# Altium PCB PADS_PCB.PcbDoc
Units mm, origin at the board's own origin, x right, y up, seen from the top; angles counter-clockwise.
Board outline 50 x 26 mm, 2 copper layers (Top Layer, Bottom Layer); 47 components, 29 nets, 195 pads, 13 vias.
Unrouted connection lines stored in the file: 111.
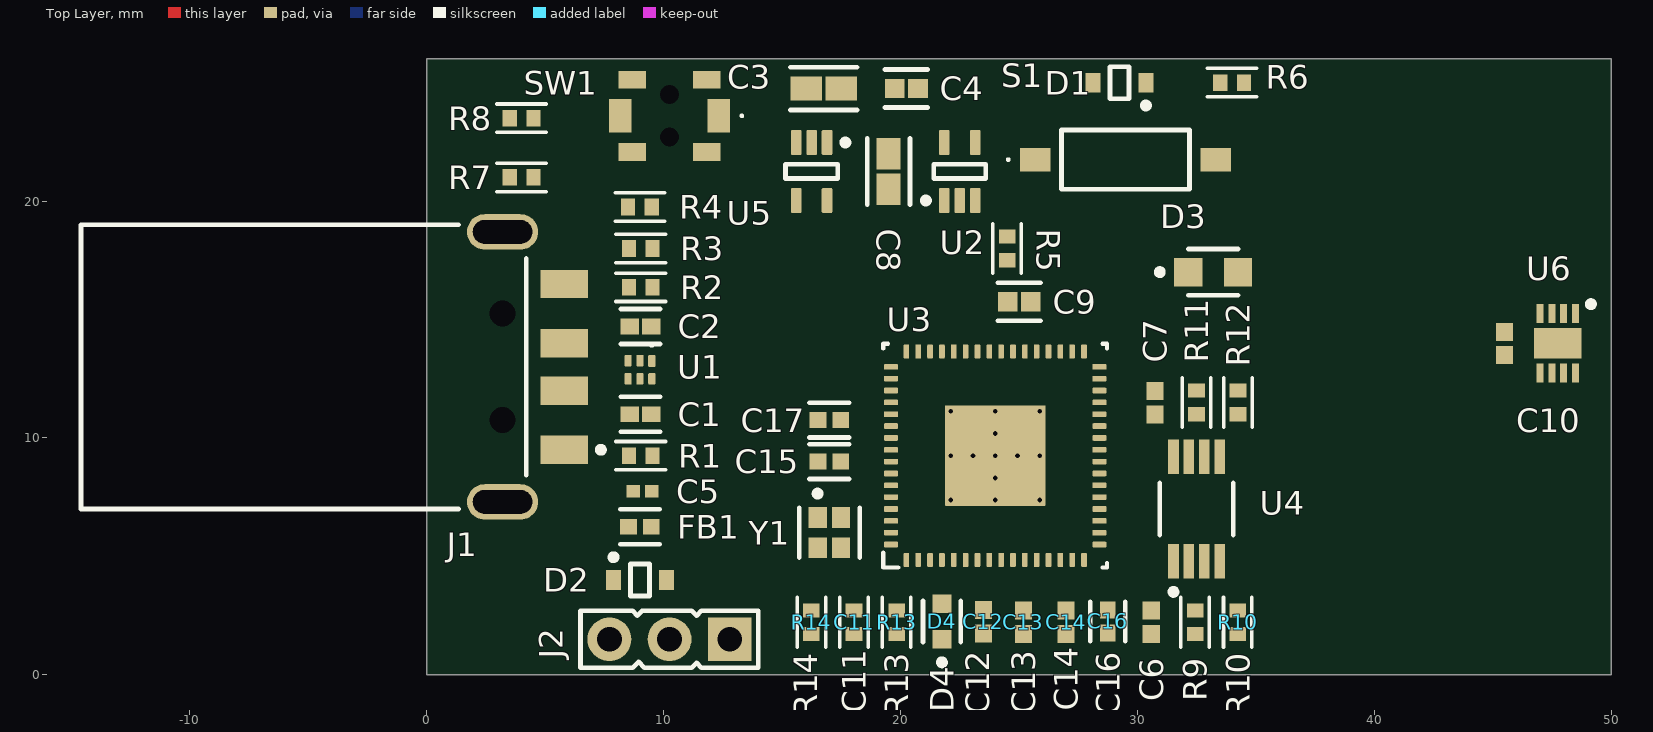
[diagram p0: Top Layer view]
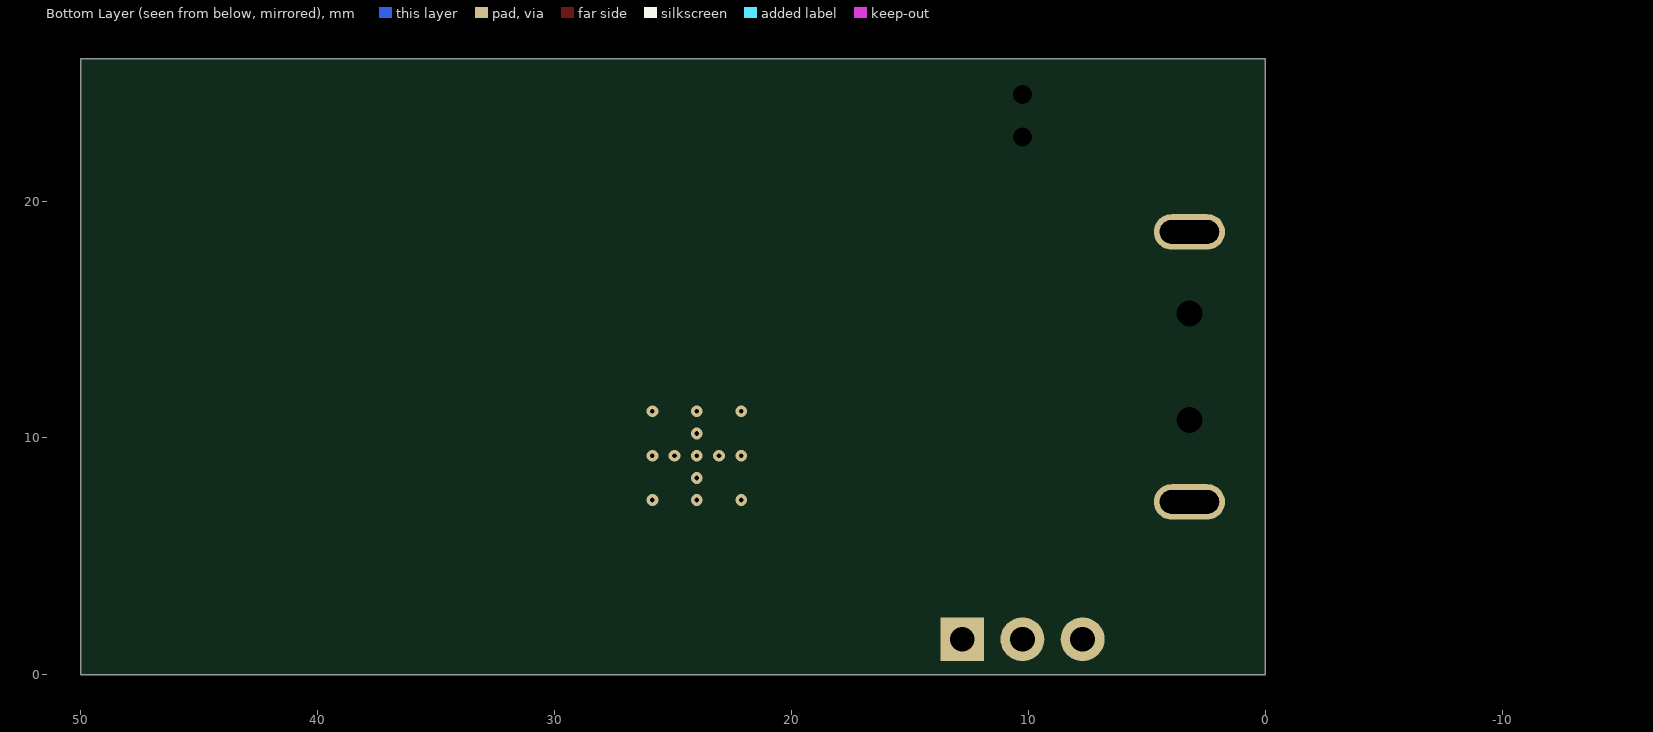
[diagram p1: Bottom Layer view, seen from below]

## Layer stack, top to bottom
Top Solder: solder mask 0.0102, Solder Resist, Dk 3.5
Top Layer: signal copper 0.0356
Dielectric 1: dielectric 0.32, FR-4, Dk 4.8
Bottom Layer: signal copper 0.0356
Bottom Solder: solder mask 0.0102, Solder Resist, Dk 3.5

## Board outline
0,0 50,0 50,26 0,26

## Design rules (kind name [scope] priority, off if disabled: settings)
Clearance [All] p1: gap=0.203 ignorepadtopadclearanceinfootprint=TRUE
PolygonConnect [All] p1: connectstyle=Relief reliefconductorwidth=0.254 reliefentries=4 polygonreliefangle="90 Angle" airgapwidth=0.254
RoutingVias [All] p1: holewidth=0.711 width=1.27 viastyle="Through Hole" minholewidth=0.711 minwidth=1.27 maxholewidth=0.711 maxwidth=1.27
SolderMaskExpansion [All] p1: expansion=0.102 istentingtop=FALSE
SupplyNets "Schematic Supply Nets_5" [InNet('3V3')] p1: voltage=0.000
SupplyNets "Schematic Supply Nets_4" [InNet('GND')] p2: voltage=0.000
SupplyNets "Schematic Supply Nets_3" [InNet('VCORE')] p3: voltage=0.000
SupplyNets "Schematic Supply Nets_2" [InNet('V18')] p4: voltage=0.000
SupplyNets "Schematic Supply Nets_1" [InNet('VCC')] p5: voltage=0.000
SupplyNets "Schematic Supply Nets" [InNet('VUSB')] p6: voltage=0.000
Width [All] p1: maxlimit=0.254 minlimit=0.254 preferedwidth=0.254
30 further rules are at their usual default settings.

## Components (designator, comment, footprint, x,y, rotation, side; value= is the part's Value field where it differs from the comment)
C1 "10pF" FP-C0402-BB-IPC_A 9.021,11 r0 top value="10 pF"
C2 "10pF" FP-C0402-BB-IPC_A 9.021,14.703 r0 top value="10 pF"
C3 "10uF" FP-C1608-080-0_1-IPC_A 16.759,24.75 r180 top
C4 "2.2uF" FP-GRM155-0_2-IPC_A 20.25,24.75 r180 top
C5 "100nF" CAPC1005X55X25LL05T10 9.11,7.75 r180 top
C6 "100nF" CAPC1005X55X25ML05T10 30.589,2.217 r90 top
C7 "100nF" CAPC1005X55X25ML05T10 30.75,11.49 r270 top
C8 "10uF" FP-C1608-080-0_1-IPC_A 19.5,21.25 r270 top
C9 "2.2uF" FP-GRM155-0_2-IPC_A 25.011,15.75 r0 top
C10 "100nF" CAPC1005X55X25ML05T10 45.5,13.99 r270 top
C11 "2.2nF" RES 18.039,2.217 r270 top
C12 "100nF" CAPC1005X55X25ML05T10 23.5,2.24 r90 top
C13 "100nF" CAPC1005X55X25ML05T10 25.189,2.217 r90 top
C14 "100nF" CAPC1005X55X25ML05T10 26.989,2.217 r90 top
C15 "470nF" FP-0402-L_1_0_0_05-W_0_5-IPC_A 17,9 r180 top
C16 "470nF" FP-0402-L_1_0_0_05-W_0_5-IPC_A 28.75,2.25 r270 top
C17 "470nF" FP-0402-L_1_0_0_05-W_0_5-IPC_A 17,10.75 r180 top
D1 "4V3" ONSC-SOD-323-2-477-02_V 29.25,25 r180 top
D2 "6V2" ONSC-SOD-323-2-477-02_V 9,4 r0 top
D3 "Green" FP-APHCM2012CGCK-F01-MFG 33.2,17 r0 top
D4 "Red" FP-SML-LX0603SIW-TR-MFG 21.75,2.25 r90 top
FB1 "220Ω" FP-BLM15-0_05-IPC_A 9,6.25 r180 top
J1 "480-37-1000" MOLX-480-37-1000_V 4.5,13 r270 top
J2 "Header_3x1" HEADER_3X1 12.79,1.5 r180 top
R1 "22" RES 9.033,9.25 r180 top
R2 "22" RES 9.033,16.361 r180 top
R3 "1M" RES 9.033,18 r180 top
R4 "1k5" RES 9,19.75 r180 top
R5 "100k" RES 24.5,18 r90 top
R6 "1k" RES 34,25 r180 top
R7 "47" RES 4,21 r180 top
R8 "110" RES 4,23.5 r180 top
R9 "10k" RES 32.439,2.217 r270 top
R10 "10k" RES 34.239,2.217 r270 top
R11 "10k" RES 32.5,11.5 r90 top
R12 "10k" RES 34.25,11.5 r90 top
R13 "1k" RES 19.839,2.217 r270 top
R14 "33k" RES 16.239,2.217 r90 top
S1 "CHS-01TB" CHS01TB 29.5,21.75 r270 top
SW1 "PTS820 J20M SMTR LFS" PTS820J20MPSMTRLFS 10.25,23.6 r180 top
U1 "TPD4E004DRYR" DRY0006A 9,12.88 r270 top
U2 "TLV70033DCKR" DCK0005A_M 22.5,21.25 r90 top
U3 "MSP430F5528IRGCR" RGC0064B 24,9.25 r90 top
U4 "TCA9517DGKR" FP-DGK0008A-MFG 32.5,7 r90 top
U5 "TLV70033DCKR" DCK0005A_M 16.25,21.25 r270 top
U6 "HDC3020DEF" SON50P250X250X80-9N-D 47.75,14 r270 top
Y1 "24MHz" FP-ABM11W-MFG 17,6 r270 top

## Footprints (in the part's own frame and the unit in brackets; to place one, negate y for a bottom-side part, rotate by r counter-clockwise, add the part's x,y. Pads: shape width x height; smd on the part's side, far side on the other; paste and mask are expansions set on the pad)
CAPC1005X55X25LL05T10 [mm] "Chip Capacitor, 2-Leads, Body 1.05x0.55mm, IPC High Density"
  rect 0.56x0.52 smd: 1(-0.39,0) 2(0.39,0)
  body extent -0.53,-0.28 0.53,0.28, height 0.55
CAPC1005X55X25ML05T10 [mm] "Chip Capacitor, 2-Leads, Body 1.05x0.55mm, IPC Low Density"
  rect 0.76x0.72 smd: 1(-0.49,0) 2(0.49,0)
  body extent -0.53,-0.28 0.53,0.28, height 0.55
CHS01TB [mm]
  rect 1x1.27 smd: 1(0,-3.81) 2(0,3.81)
  silkscreen extent -1.25,-5 1.25,2.7
DCK0005A_M [mm] "SOT23, 5-Leads, Body 2.15x1.4mm, Pitch 0.65mm, IPC Low Density"
  rrect22% 1.05x0.45 smd: 1(-1.225,0.65) 2(-1.225,0) 3(-1.225,-0.65) 4(1.225,-0.65) 5(1.225,0.65)
  silkscreen extent -1.35,-1.1 0.3,1.55, body extent -1.14,-1 1.14,1, height 0.94
DRY0006A [mm] "SON, 6-Leads, Body 1.45x1mm, Pitch 0.5mm"
  rrect33% 0.52x0.3 smd: 1(-0.37,0.5)
  rrect33% 0.49x0.3 smd: 2(-0.385,0) 3(-0.385,-0.5) 4(0.385,-0.5) 5(0.385,0) 6(0.385,0.5)
  silkscreen extent -1.08,0.45 -0.98,0.55, body extent -0.5,-0.72 0.5,0.72, height 0.6
FP-0402-L_1_0_0_05-W_0_5-IPC_A [mm]
  rect 0.715x0.672 smd paste+0 mask+0: 1(-0.479,0) 2(0.479,0)
  silkscreen extent -0.84,-0.74 0.84,0.74, body extent -1.04,-0.54 1.04,0.54, height 0.25
FP-ABM11W-MFG [mm]
  rect 0.875x0.775 smd paste+0 mask+0: 1(-0.637,-0.487) 2(0.637,-0.487) 3(0.637,0.487) 4(-0.637,0.487)
  silkscreen extent -1.77,-1.28 1.05,1.28, body extent -1.17,-0.97 1.17,0.97, height 0.25
FP-APHCM2012CGCK-F01-MFG [mm]
  rect 1.2x1.2 smd paste+0 mask+0: 1(-1.05,0) 2(1.05,0)
  silkscreen extent -2.37,-0.97 1.05,0.97, body extent -1.75,-0.77 1.75,0.77, height 0.25
FP-BLM15-0_05-IPC_A [mm]
  rect 0.715x0.672 smd paste+0 mask+0: 1(-0.479,0) 2(0.479,0)
  silkscreen extent -0.84,-0.74 0.84,0.74, body extent -1.04,-0.54 1.04,0.54, height 0.25
FP-C0402-BB-IPC_A [mm]
  rect 0.765x0.672 smd paste+0 mask+0: 1(-0.454,0) 2(0.454,0)
  silkscreen extent -0.84,-0.74 0.84,0.74, body extent -1.04,-0.54 1.04,0.54, height 0.25
FP-C1608-080-0_1-IPC_A [mm]
  rect 1.331x1.012 smd paste+0 mask+0: 1(-0.741,0) 2(0.741,0)
  silkscreen extent -1.41,-0.91 1.41,0.91, body extent -1.91,-1.01 1.91,1.01, height 0.25
FP-DGK0008A-MFG [mm]
  rect 1.45x0.45 smd paste+0 mask+0: 1(-2.2,0.975) 2(-2.2,0.325) 3(-2.2,-0.325) 4(-2.2,-0.975) 5(2.2,-0.975) 6(2.2,-0.325) 7(2.2,0.325) 8(2.2,0.975)
  silkscreen extent -3.62,-1.55 1.1,1.55, body extent -3.03,-1.8 3.03,1.8, height 0.25
FP-GRM155-0_2-IPC_A [mm]
  rect 0.828x0.806 smd paste+0 mask+0: 1(-0.489,0) 2(0.489,0)
  silkscreen extent -0.9,-0.8 0.9,0.8, body extent -1.1,-0.6 1.1,0.6, height 0.25
FP-SML-LX0603SIW-TR-MFG [mm]
  rect 0.8x0.8 smd paste+0 mask+0: 1(-0.75,0) 2(0.75,0)
  silkscreen extent -1.85,-0.8 0.86,0.8, body extent -1.25,-0.56 1.25,0.56, height 0.25
HEADER_3X1 [mm]
  rect 1.85x1.85 hole 1.05: 1(0,0)
  round 1.85 hole 1.05: 2(2.54,0) 3(5.08,0)
  silkscreen extent -1.2,-1.2 6.3,1.2
MOLX-480-37-1000_V [mm] "CONN, 4-Leads, Body 12x18.8mm"
  rect 1.2x2 smd: 1(3.5,1.3) 2(1,1.3) 3(-1,1.3) 4(-3.5,1.3)
  oval 1.5x3 hole 1 slot 2.5 at 90 deg: 5(-5.7,-1.3) 6(5.7,-1.3)
  round 0.5 hole 1.1 unplated: MH1(-2.25,-1.3) MH2(2.25,-1.3)
  silkscreen extent -6,-19.1 6,2.98, body extent -6.35,-19.08 6.35,2.2, height 3.07
ONSC-SOD-323-2-477-02_V [mm] "SOD, 2-Leads, Body 1.7x1.25mm"
  rect 0.63x0.83 smd: 1(-1.115,0) 2(1.115,0)
  silkscreen extent -1.24,-0.67 0.4,1.09, body extent -0.85,-0.63 0.85,0.63, height 1.06
PTS820J20MPSMTRLFS [mm]
  rect 0.95x1.4 smd: 1(-2.075,0) 2(2.075,0)
  rect 1.15x0.75 smd: 3(-1.575,-1.525) 4(1.575,-1.525) 5(1.575,1.525) 6(-1.575,1.525)
  round 0.4 hole 0.8 unplated: 7(0,-0.9) 8(0,0.9)
  silkscreen extent -3.1,-0.05 -3,0.05, body extent -2.25,-1.45 2.25,1.45, height 2.05
RES [mm] "0402 Resistor Footprint"
  rect 0.6x0.7 smd: 1(-0.5,0) 2(0.5,0)
  silkscreen extent -1.05,-0.6 1.05,0.6
RGC0064B [mm] "QFN, 64-Leads, Body 9.15x9.15mm, Pitch 0.5mm"
  rrect42% 0.6x0.24 smd mask+0.07: 1(-4.4,3.75) 2(-4.4,3.25) 3(-4.4,2.75) 4(-4.4,2.25) 5(-4.4,1.75) 6(-4.4,1.25) 7(-4.4,0.75) 8(-4.4,0.25) 9(-4.4,-0.25) 10(-4.4,-0.75) 11(-4.4,-1.25) 12(-4.4,-1.75) 13(-4.4,-2.25) 14(-4.4,-2.75) 15(-4.4,-3.25) 16(-4.4,-3.75) 33(4.4,-3.75) 34(4.4,-3.25) 35(4.4,-2.75) 36(4.4,-2.25) 37(4.4,-1.75) 38(4.4,-1.25) 39(4.4,-0.75) 40(4.4,-0.25) 41(4.4,0.25) 42(4.4,0.75) 43(4.4,1.25) 44(4.4,1.75) 45(4.4,2.25) 46(4.4,2.75) 47(4.4,3.25) 48(4.4,3.75)
  rrect42% 0.24x0.6 smd mask+0.07: 17(-3.751,-4.4) 18(-3.251,-4.4) 19(-2.751,-4.4) 20(-2.251,-4.4) 21(-1.75,-4.4) 22(-1.25,-4.4) 23(-0.75,-4.4) 24(-0.25,-4.4) 25(0.25,-4.4) 26(0.75,-4.4) 27(1.25,-4.4) 28(1.75,-4.4) 29(2.251,-4.4) 30(2.751,-4.4) 31(3.251,-4.4) 32(3.751,-4.4) 49(3.751,4.4) 50(3.251,4.4) 51(2.751,4.4) 52(2.251,4.4) 53(1.75,4.4) 54(1.25,4.4) 55(0.75,4.4) 56(0.25,4.4) 57(-0.25,4.4) 58(-0.75,4.4) 59(-1.25,4.4) 60(-1.75,4.4) 61(-2.251,4.4) 62(-2.751,4.4) 63(-3.251,4.4) 64(-3.751,4.4)
  rrect2% 4.25x4.25 smd paste-2.112: 65(0,0)
  silkscreen extent -4.72,-4.72 4.72,4.72, body extent -4.57,-4.57 4.57,4.57, height 1.01
SON50P250X250X80-9N-D [mm]
  rect 0.8x0.3 smd: 1(-1.25,0.75) 2(-1.25,0.25) 3(-1.25,-0.25) 4(-1.25,-0.75) 5(1.25,-0.75) 6(1.25,-0.25) 7(1.25,0.25) 8(1.25,0.75)
  rect 1.3x2 smd: 9(0,0)
  silkscreen extent -1.77,1.28 -1.53,1.53, body extent -1.3,-1.25 1.3,1.25, height 0.8

## Part data
C1 C2: library part CMP-2008-03443-2, "C0402C100K4GACTU / CAP CER 10PF 16V 10% NP0 0402", Capacitance="10 pF", Manufacturer=Kemet, Manufacturer Part Number=C0402C100K4GACTU, Package=C0402-BB, Temperature="-55°C to +125°C", Temperature Characteristic=C0G, Temperature Coefficient=15%, Temperature Range High=+125°C, Temperature Range Low=-55°C, Tolerance=0.1, Voltage Rating="16 V", Automotive=No, Category=Cap, ComponentLink2Description=Datasheet, ComponentLink2URL=https://content.kemet.com/datasheets/KEM_C1002_X7R_SMD.pdf, Device Class L1="Passive Components", Device Class L2=Capacitors, Device Class L3="Ceramic Capacitors", Digikey Description="CAP CER 10PF 16V 10% NP0 0402", Height=0.55mm, Ipc Land Pattern Name=CAPC10050X50, Lead Free=Yes, Material=Ceramic, Mouser Description="Multilayer Ceramic Capacitors MLCC - SMD/SMT 16volts 10pF C0G 10%", Octopart=https://octopart.com/c0402c100k4gactu-kemet-12569135, RoHS=TRUE
C3 C8: library part CMP-2000-04980-2, "C1608X5R1A106M080AC / Multilayer Ceramic Capacitors 10μF ±20% 10V X5R SMD 0603", Case Code (Imperial)=0603, Case Code (Metric)=1608, Dielectric=X5R, Dielectric Material=Ceramic, Max Operating Temperature=85°C, Min Operating Temperature=-55°C, Package Quantity=1, Tolerance=20%, Voltage Rating=10V, Capacitance=10uF, Case/Package=0603, Construction=Flat, Depth=0.8mm, Height=0.8mm, Lead Free="Lead Free", Length=1.6mm, Mount="Surface Mount", Number of Pins=2, Packaging="Tape and Reel", Radiation Hardening=No, REACH SVHC="No SVHC", Resistor Type=Ceramic, RoHS Compliant=Yes, Series=C, Termination=SMD/SMT, Thickness=0.035inch, Voltage Rating (DC)=10V, Weight=7.1E-05oz, Width=0.031inch
C4 C9: library part CMP-06035-001793-1, "GRM155R61C225KE11D / Chip Multilayer Ceramic Capacitors for General Purpose, 0402, 2.2uF, X5R, 15%, 10%, 16V", Case Code (Imperial)=0402, Case Code (Metric)=1005, Max Operating Temperature=85°C, Min Operating Temperature=-55°C, Tolerance=10%, Voltage Rating=16V, Capacitance=2.2uF, Case/Package=0402, Height=0.3mm, Lead Free="Lead Free", Length=0.039inch, Material=Ceramic, Mount="Surface Mount", Packaging="Tape and Reel", Thickness=0.022inch, Voltage Rating (DC)=16V, Width=0.02inch
C5 C6 C7 C10 C12 C13 C14: library part CMP-2000-06554-2, "LMK105BJ104KV-F / CAP, CERM, 0.1 uF, 10 / V,+/- 10%, X5R, 0402", Case Code (Imperial)=0402, Case Code (Metric)=1005, Dielectric=X5R, Max Operating Temperature=85°C, Min Operating Temperature=-55°C, Package Quantity=1, Resistor Type=Ceramic, Tolerance=10%, Voltage Rating=10V, Capacitance=100nF, Case/Package=0402, Construction=Flat, Contact Plating=Tin, Depth=0.5mm, Halogen Free="Halogen Free", Height=0.5mm, Lead Free="Lead Free", Length=1mm, Mount="Surface Mount", Number of Pins=2, Packaging="Tape and Reel", Radiation Hardening=No, REACH SVHC="No SVHC", RoHS Compliant=Yes, Series=M, Termination=SMD/SMT, Thickness=0.022inch, Voltage Rating (DC)=10V, Width=0.02inch
C11: library part CAP, "CL05B222JB5NNNC / CAP, CERM, 2200 pF, 50 / V, +/- 5%, X7R, 0402", Supplier Part Number=CL05B222JB5NNNC, Supplier="Arrow Electronics"
C15 C16 C17: library part CMP-14477-000096-2, "JMK105B7474KVHF / CAP, CERM, 0.47 uF, 6.3 / V, +/- 10%, X7R, 0402", Case Code (Imperial)=0402, Case Code (Metric)=1005, Dielectric=X7R, Max Operating Temperature=125°C, Min Operating Temperature=-55°C, Package Quantity=10000, Ratings=AEC-Q200, Tolerance=10%, Voltage Rating=6.3V, Capacitance=470nF, Case/Package=0402, Halogen Free="Halogen Free", Height=0.5mm, Lead Free="Lead Free", Length=0.039inch, Mount="Surface Mount", Packaging="Tape and Reel", RoHS Compliant=Yes, Termination=SMD/SMT, Thickness=0.022inch, Voltage Rating (DC)=6.3V, Weight=2.3E-05oz, Width=0.5mm
D1: library part CMP-1060-00656-1, "SZMM3Z4V3T1G / Zener Voltage Regulator, 300 mW, 2-Pin SOD-323, Pb-Free, Tape and Reel", Manufacturer="On Semiconductor", PartNumber=SZMM3Z4V3T1G, ComponentLink1Description="Manufacturer URL", ComponentLink1URL=http://www.onsemi.com/, ComponentLink2Description=Datasheet, ComponentLink2URL=http://www.onsemi.cn/pub_link/Collateral/MM3Z2V4T1-D.PDF, ComponentLink3Description="Package Specification", ComponentLink3URL=http://www.onsemi.com/pub_link/Collateral/477-02.PDF.1, DatasheetVersion="Rev. 9", Mounting Technology="Surface Mount", P Max (W)=0.3, PackageDescription="2-Pin SOD, Body 1.7 x 1.25 mm", PackageReference=SOD-323-2-477-02, PackageVersion="Rev. H, 03/2007", Packing="Tape and Reel", RoHS=Pb-Free, VZ Typ (V)=4.3
D2: library part CMP-1060-00681-1, "SZMM3Z6V2ST1G / Zener Voltage Regulator, 300 mW, Tight Tolerance Portfolio, 2-Pin SOD-323, Pb-Free, Tape and Reel", Manufacturer="On Semiconductor", PartNumber=SZMM3Z6V2ST1G, ComponentLink1Description="Manufacturer URL", ComponentLink1URL=http://www.onsemi.com/, ComponentLink2Description=Datasheet, ComponentLink2URL=http://www.onsemi.cn/pub_link/Collateral/MM3Z2V4ST1-D.PDF, ComponentLink3Description="Package Specification", ComponentLink3URL=http://www.onsemi.com/pub_link/Collateral/477-02.PDF.1, DatasheetVersion="Rev. 21", Mounting Technology="Surface Mount", P Max (W)=0.3, PackageDescription="2-Pin SOD, Body 1.7 x 1.25 mm", PackageReference=SOD-323-2-477-02, PackageVersion="Rev. H, 03/2007", Packing="Tape and Reel", RoHS=Pb-Free
D3: library part CMP-44529-000062-1, "APHCM2012CGCK-F01 / LED GREEN CLEAR CHIP SMD", Case Code (Imperial)=0805, Case Code (Metric)=2012, Forward Current=20mA, Forward Voltage=2.1V, Lens Color=Clear, Max Operating Temperature=85°C, Min Operating Temperature=-40°C, Package Quantity=1, Case/Package=0805, Color=Green, Dominant Wavelength=570nm, Height=0.4mm, Illumination Color=Green, Lead Free="Lead Free", Length=2mm, Lens Style=Clear, Luminous Intensity=40mcd, Mount="Surface Mount", Number of LEDs=1, Number of Pins=2, Packaging="Tape and Reel", RoHS Compliant=Yes, Series=APHCM, Test Current=20mA, Viewing Angle=110°, Wavelength=570nm, Width=1.25mm
D4: library part CMP-57192-000009-1, "SML-LX0603SIW-TR / LED RED DIFFUSED SMD", Case Code (Imperial)=0603, Case Code (Metric)=1608, Forward Current=20mA, Forward Voltage=2V, Lens Color=White, Max Operating Temperature=85°C, Min Operating Temperature=-25°C, Package Quantity=1, Power Rating=50mW, Approvals=UL, Case/Package=0603, Color=Red, Dominant Wavelength=636nm, Height=0.6mm, Illumination Color=Red, Lead Free="Lead Free", Length=1.6mm, Lens Style=Diffused, Lens Transparency=Diffused, Luminous Intensity=60mcd, Moisture Sensitivity Level=2, Mount="Surface Mount", Number of LEDs=1, Number of Pins=2, Packaging="Tape and Reel", REACH SVHC="No SVHC", RoHS Compliant=Yes, Test Current=20mA, Viewing Angle=140°, Wavelength=636nm, Width=0.8mm
FB1: library part CMP-0686-00173-4, "Chip Ferrite Bead, 0402, 220Ω @ 100MHz, 0.29Ω, 25%, 450mA", Case Code (Imperial)=0402, Case Code (Metric)=1005, Current Rating=450mA, DC Current=300mA, DC Resistance (DCR)=290mR, Max Operating Temperature=125°C, Min Operating Temperature=-55°C, Package Quantity=1, Resistance=350mR, Test Frequency=100MHz, Tolerance=25%, Case/Package=0402, Core Material=Ferrite, Depth=0.55mm, Height=0.5mm, Impedance=220R, Lead Free="Lead Free", Length=1mm, Material=Steel, Max Current Rating=450mA, Max DC Current=300mA, Military Standard=Not, Number of Circuits=1, Number of Lines=1, Number of Pins=2, Packaging="Tape and Reel", Radiation Hardening=No, REACH SVHC="No SVHC", RoHS Compliant=Yes, Shielding=Unshielded, Termination=SMD/SMT, Width=0.5mm
J1: library part CMP-1676-00005-2, "Universal Serial Bus (USB) Shielded I/O Plug, Type A, Right Angle Connector, 1.5 A, -20 to 85 degC, 4-Pin SMD, RoHS, Tray", Case Code (Imperial)=0603, Case Code (Metric)=1608, Max Operating Temperature="155 degC", Min Operating Temperature="-55 degC", Package Quantity=5000, Power Rating="100 mW", Resistance="1 mohm", Tolerance=1%, Voltage Rating="50 V", Case\Package=0603, ComponentLink1Description="Manufacturer URL", ComponentLink1URL=http://www.molex.com/, ComponentLink2Description=Datasheet, ComponentLink2URL=http://www.molex.com/pdm_docs/sd/480371000_sd.pdf, DatasheetVersion="Rev. D, 06/2004", Height="0.45 mm", Length="1.6 mm", Mount="Surface Mount", PackageDescription="4-Pin Surface Mount Device, Body 12 x 18.8 mm", PackageReference=480-37-1000, Packaging="Tape and Reel", Pins=2, REACH SVHC="No SVHC", RoHSCompliant=true, Voltage Rating (DC)="50 V", Width="0.8 mm"
J2: library part "Header 3x1"
R1 R2 R3 R4 R5 R6 R7 R8 R9 R10 R11 R12 R13 R14: library part RES
S1: "DIP Switches / SIP Switches smd slide 1 pos., gull wing, washable with seal tape, 1/2 pitch", Manufacturer_Name="Nidec Copal", Mouser Part Number=229-CHS-01TB, Datasheet Link=https://www.nidec-copal-electronics.com/e/catalog/switch/chs.pdf, Geometry.Height=2.5mm, Manufacturer_Part_Number=CHS-01TB, Mouser Price/Stock=https://www.mouser.co.uk/ProductDetail/Nidec-Components/CHS-01TB?qs=XeJtXLiO41QqOM3HIs2O2A%3D%3D
U1: library part CMP-0326-00024-3, "ESD-Protection Array for High-Speed Data Interfaces, 4 Channels, -40 to +85 degC, 6-pin SON (DRY), Green (RoHS & no Sb/Br)", Breakdown Voltage(Min)(V)=6, IO Capacitance(Typ)(pF)=1.6, IO Leakage Current(nA)=1, Manufacturer="Texas Instruments", 1394 / Firewire=TRUE, ComponentLink1Description="Manufacturer URL", ComponentLink1URL=http://www.ti.com/, ComponentLink2Description=Datasheet, ComponentLink2URL=http://www.ti.com/general/docs/lit/getliterature.tsp?genericPartNumber=TPD4E004&fileType=pdf, ComponentLink3Description="URL Link1", ComponentLink3URL=SamplesURL:http://www.ti.com/product/tpd4e004#samples, DatasheetVersion=SLVS729A, Eco-Plan="Green (RoHS & no Sb/Br)", IEC 61000-4-2 Air-Gap(+/- kV)=12, IEC 61000-4-2 Contact(+/- kV)=8, Mounting Technology="Surface Mount", PackageDescription="6-Pin Plastic Small Outline No-Lead, 1 x 1.45 x 0.6 mm Body, 0.5 mm Pitch", PackageReference=DRY0006A, PackageVersion="revF, Dec-2011", PartNumber=TPD4E004DRYR, Serial ATA / eSATA=TRUE, SubFamily="ESD Solution", USB High Speed=TRUE
U2 U5: library part CMP-0394-00820-2, "Single Output LDO, 200 mA, Fixed 3.3 V Output, 2 to 5.5 V Input, with Low IQ, 5-pin SC70 (DCK), -40 to 125 degC, Green (RoHS & no Sb/Br)", Manufacturer="Texas Instruments", Accuracy(%)=2, Code_JEDEC=MO-203, ComponentLink1Description="Manufacturer URL", ComponentLink1URL=http://www.ti.com/, ComponentLink2Description=Datasheet, ComponentLink2URL=http://www.ti.com/general/docs/lit/getliterature.tsp?genericPartNumber=TLV70033&fileType=pdf, ComponentLink3Description="Package Specification", ComponentLink3URL=http://www.ti.com/litv/pdf/mpds025f, DatasheetVersion=SLVSA00D, Eco-Plan="Green (RoHS & no Sb/Br)", Fixed Output Options(V)=3.3, Iout(Max)(A)=0.2, Iq(Typ)(mA)=0.03, Mounting Technology="Surface Mount", PackageDescription="5-Pin Plastic Small-Outline, Body 2 x 1.25 mm, Pitch 0.65 mm", PackageReference=DCK0005A, PackageVersion=4093553-3/G, PartNumber=TLV70033DCKR, SubFamily="Single Channel LDO", Vdo(Typ)(mV)=175, Vin(Max)(V)=5.5, Vin(Min)(V)=2, Vout Adj(Max)(V)=3.3, Vout Adj(Min)(V)=3.3
U3: library part CMP-0365-00971-2, "25 MHz Mixed Signal Microcontroller with 128 KB Flash, 8192 B SRAM and 47 GPIOs, -40 to 85 degC, 64-pin QFN (RGC), Green (RoHS & no Sb/Br)", Frequency(MHz)=25, Manufacturer="Texas Instruments", Temp Sensor=Yes, ADC="12-bit SAR", ADC Channels=16, Brown Out Reset=Yes, Comparators=Yes, ComponentLink1Description="Manufacturer URL", ComponentLink1URL=http://www.ti.com/, ComponentLink2Description=Datasheet, ComponentLink2URL=http://www.ti.com/general/docs/lit/getliterature.tsp?genericPartNumber=MSP430F5528&fileType=pdf, ComponentLink3Description="Package Specification", ComponentLink3URL=http://www.ti.com/lit/ds/symlink/ucd3138.pdf, DatasheetVersion=SLAS590I, DMA=3, Eco-Plan="Green (RoHS & no Sb/Br)", Flash(KB)=128, GPIO=47, Mounting Technology="Surface Mount", Multiplier=32x32, PackageDescription="64-Pin Plastic Flat Pack, Body 9 x 9 mm, Pitch 0.5 mm", PackageReference=RGC0064B, PackageVersion=4204106/F, PartNumber=MSP430F5528IRGCR, Real-Time Clock=Yes, SRAM(B)=8192, SubFamily="5 Series", SVS=Yes, Timers - 16-bit=4, USB=1, USCI_A (UART/LIN/IrDA/SPI)=2, USCI_B (I2C & SPI)=2, Watchdog=Yes
U4: library part CMP-04881-000001-1, "IC TRNSLTR BIDIRECTIONAL 8VSSOP", Ambient Temperature Range High=+85°C, Ambient Temperature Range Low=-40°C, Input Capacitance=6-8pF, Manufacturer="Texas Instruments", Max Supply Voltage=5.5V, Min Supply Voltage=0.9V, Nominal Supply Current=1.5-3mA, Package=DGK0008A, Temperature="-40°C to +85°C", Automotive=No, Category=IC, ComponentLink2Description=Datasheet, ComponentLink2URL=http://www.ti.com/lit/ds/symlink/tca9517.pdf, Device Class L1="Integrated Circuits (ICs)", Device Class L2="Interface ICs", Device Class L3=Repeaters, Digikey Description="IC TRNSLTR BIDIRECTIONAL 8VSSOP", Height=1.1mm, Interface=I2C,SMBus, Ipc Land Pattern Name=SOP65P300X110-8, Lead Free=Yes, Manufacturer Part Number=TCA9517DGKR, Mouser Description="Interface - Signal Buffers, Repeaters Level-Translating I2C Bus Repeater", Octopart=https://octopart.com/tca9517dgkr-texas+instruments-25896020, RoHS=TRUE, Sigbufrep Type=Buffer, Standoff Height=0.05mm, Temperature Range High=+85°C, Temperature Range Low=-40°C
Y1: library part CMP-27762-009177-1, "ABM11W-24.0000MHZ-8-K1Z-T3 / Crystal 24MHz ±10ppm 8pF SMD-4 2mm x 1.6mm", RoHS Compliant=Yes

## Via types
v1: diameter 0.5, hole 0.2, Top Layer to Bottom Layer, 13 vias

## Nets (pads, with @x,y where several pads share a name; then routed paths per layer and width w, separated by ;. In a path a pad name is that pad's centre, name@x,y a point inside that pad or via, vN(x,y) a via of type N, cw(c..) or ccw(c..) an arc to the next point about the centre after c; other vN are vias at no path point)
3V3: C4.1 C6.2 C10.2 D1.1 R6.2 R9.2 R10.2 U2.5 U4.1 U6.5
ALERT: U6.3
DM: R1.1 U3.52
DP: R2.1 U3.50
GND: C1.2 C2.2 C3.2 C4.2 C5.1 C6.1 C7.1 C8.1 C9.2 C10.1 C11.2 C12.1 C13.1 C14.1 C15.2 C16.2 C17.2 D1.2 D2.2 D3.1 J1.4 J2.3 R3.1 R7.1 S1.2 U1.3 U2.2 U3.14 U3.16 U3.39 U3.49 U3.56 U3.65 U4.4 U5.2 U6.2 U6.7 U6.8 U6.9 Y1.2 Y1.4
  other v1: 22.125,7.375 24,7.375 25.875,7.375 24,8.312 22.125,9.25 23.063,9.25 24,9.25 24.937,9.25 25.875,9.25 24,10.187 22.125,11.125 24,11.125 25.875,11.125
"MCU SCL": R11.1 U3.43 U4.7
"MCU SDA": R12.1 U3.42 U4.6
NetC1_1: C1.1 J1.2 R1.2 U1.5
NetC2_1: C2.1 J1.3 R2.2 R3.2 R4.2 U1.2
NetC5_2: C5.2 D2.1 FB1.2 J1.1 U1.6
NetD3_2: D3.2 R6.1
NetD4_1: D4.1 R13.2
NetJ1_5: J1.5 J1.6 R7.2
NetR5_1: R5.1 S1.1 U2.3
NetR8_1: R8.1 SW1.2
NetR13_1: R13.1 U3.2
PUR: R4.1 SW1.1 U3.51
RESET: U6.6
SBWTCK: J2.1 U3.59
SBWTDIO: C11.1 J2.2 R14.2 U3.64
SCL: R9.1 U4.2 U6.4
SDA: R10.1 U4.3 U6.1
V18: C15.1 U3.55
VBUS: C3.1 C8.2 FB1.1 R5.2 U2.1 U3.53 U5.1 U5.3
VCC: C7.2 C9.1 C12.2 C13.2 C14.2 D4.2 R8.2 R11.2 R12.2 R14.1 U3.11 U3.15 U3.40 U4.8 U5.5
VCORE: C16.1 U3.17
VUSB: C17.1 U3.54
XT2IN: U3.57 Y1.1
XT2OUT: U3.58 Y1.3
pads on no net: J1.MH1 J1.MH2 SW1.3 SW1.4 SW1.5 SW1.6 SW1.7 SW1.8 U1.1 U1.4 U2.4 U3.1 U3.3 U3.4 U3.5 U3.6 U3.7 U3.8 U3.9 U3.10 U3.12 U3.13 U3.18 U3.19 U3.20 U3.21 U3.22 U3.23 U3.24 U3.25 U3.26 U3.27 U3.28 U3.29 U3.30 U3.31 U3.32 U3.33 U3.34 U3.35 U3.36 U3.37 U3.38 U3.41 U3.44 U3.45 U3.46 U3.47 U3.48 U3.60 U3.61 U3.62 U3.63 U4.5 U5.4

## Text inside footprints (layer, text, board x,y; h text height)
J1: Mechanical 1 "PCB EDGE" at 0.66,11.73 h0.5 r270